# Altium PCB Axis Driver PCB.PcbDoc
Units mil, origin at the board's own origin, x right, y up, seen from the top; angles counter-clockwise.
Board outline 5830 x 2255 mil, 2 copper layers (Top Layer, Bottom Layer); 104 components, 89 nets, 420 pads, 120 vias.
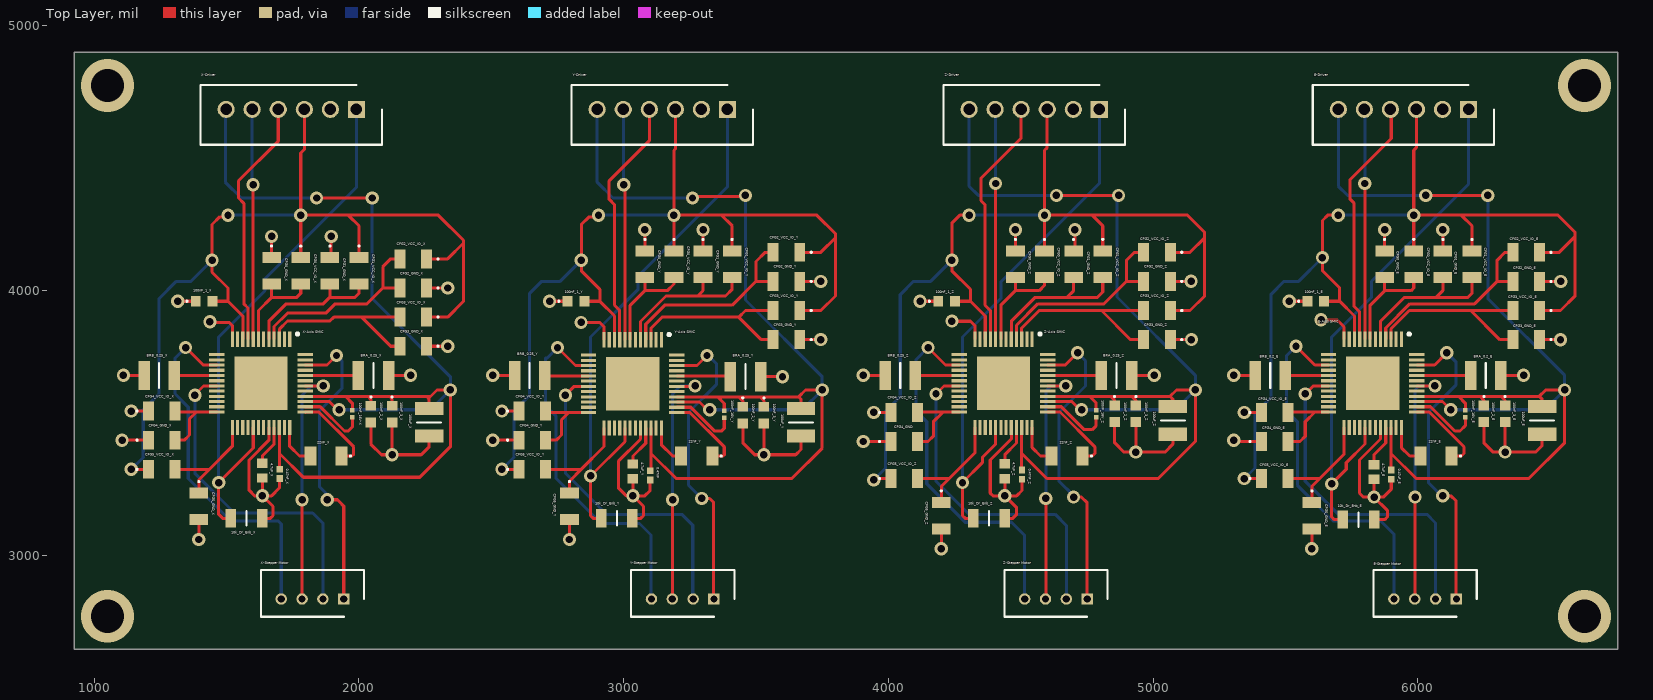
[diagram p0: Top Layer view]
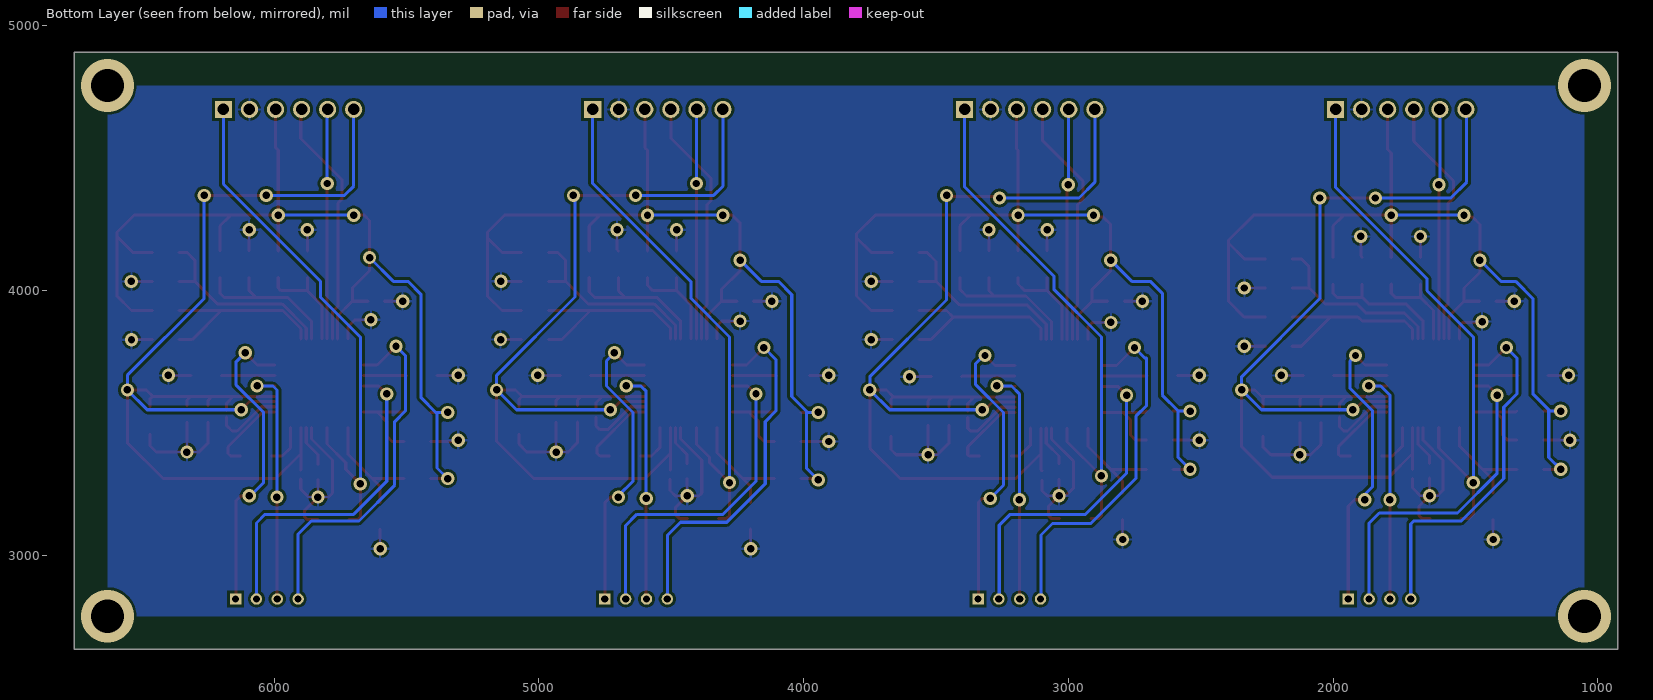
[diagram p1: Bottom Layer view, seen from below]
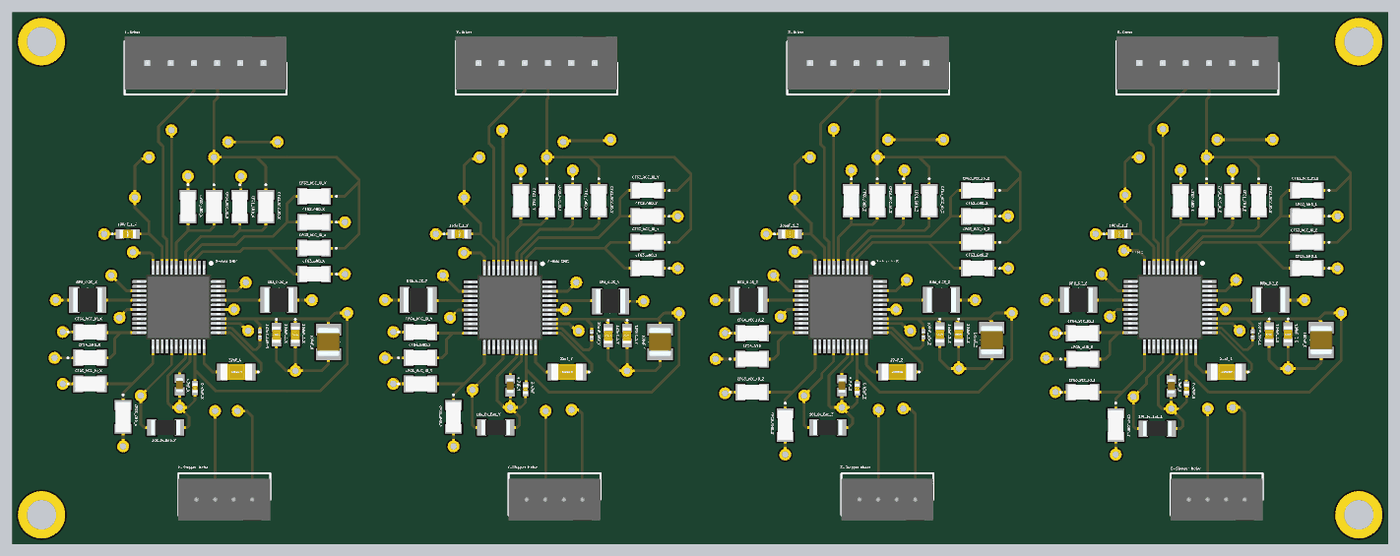
[diagram p2: 3D render of the assembled board from above, using the file's embedded part models]

## Layer stack, top to bottom
Top Solder: solder mask 0.4, Solder Resist, Dk 3.5
Top Layer: signal copper 1.4
Dielectric 1: dielectric 12.6, FR-4, Dk 4.8
Bottom Layer: signal copper 1.4
Bottom Solder: solder mask 0.4, Solder Resist, Dk 3.5

## Board outline
925,4900 6755,4900 6755,2645 925,2645

## Design rules (kind name [scope] priority, off if disabled: settings)
Clearance Clearance_1 [InNamedPolygon('GND_L02_P000')] p1: gap=10 ignorepadtopadclearanceinfootprint=FALSE
Clearance [All] p2: gap=5 ignorepadtopadclearanceinfootprint=FALSE
HoleSize [All] p1: absolutevalues=TRUE maxlimit=200 minlimit=1 maxpercent=80.000 minpercent=20.000
MinimumSolderMaskSliver [All] p1: minsoldermaskwidth=0.5
PolygonConnect [All] p1: connectstyle=Relief reliefconductorwidth=10 reliefentries=4 polygonreliefangle="90 Angle" airgapwidth=10
RoutingVias [All] p1: holewidth=28 width=50 viastyle="Through Hole" minholewidth=28 minwidth=50 maxholewidth=200 maxwidth=200
SilkToSilkClearance [All] p1: silktosilkclearance=5
SilkToSolderMaskClearance [IsPad] p1: minsilkscreentomaskgap=4 clearancetoexposedcopper=TRUE
SolderMaskExpansion [All] p1: expansion=7 istentingtop=FALSE
Width [All] p1: maxlimit=100 minlimit=10 preferedwidth=11.5
26 further rules are at their usual default settings.

## Classes and differential pairs
component class "U_Z-Axis Stepper Motor Driver": 0.47nF_Z 4.7uF_Z 10k_Dr_Enb_Z 22nF_Z 100nF_1_Z 100nF_2_Z 100nF_3_Z 100nF_16V_Z 100uF_Z BRA_0.25_Z BRB_0.25_Z CFG0_GND_Z CFG0_VCC_IO_Z CFG1_GND_Z CFG1_VCC_IO_Z CFG2_GND_Z CFG2_VCC_IO_Z CFG3_GND_Z CFG3_VCC_IO_Z CFG4_GND CFG4_VCC_IO_Z CFG5_GND_Z CFG5_VCC_IO_Z "Z-Axis SMIC"
component class "U_X_Axis Stepper Motor Driver": 0.47nF_X 4.7uF_X 10k_Dr_Enb_X 22nF_X 100nF_1_X 100nF_2_X 100nF_3_X 100nF_16V-X 100uF_X BRA_0.25_X BRB_0.25_X CFG0_GND_X CFG0_VCC_IO_X CFG1_GND_X CFG1_VCC_IO_X CFG2_GND_X CFG2_VCC_IO_X CFG3_GND_X CFG3_VCC_IO_X CFG4_GND_X CFG4_VCC_IO_X CFG5_GND_X CFG5_VCC_IO_X "X-Axis SMIC"
component class "U_Extruder Stepper Motor Driver": 0.47uF_E 4.7uF_E 10k_Dr_Enb_E 22nF_E 100nF_1_E 100nF_2_E 100nF_3_E 100nF_16V_E 100uF_E BRA_0.2_E BRB_0.2_E CFG0_GND_E CFG0_VCC_IO_E CFG1_GND_E CFG1_VCC_IO_E CFG2_GND_E CFG2_VCC_IO_E CFG3_GND_E CFG3_VCC_IO_E CFG4_GND_E CFG4_VCC_IO_E CFG5_GND_E CFG5_VCC_IO_E "E-Axis SMIC"
component class "Stepper Motor Driver Board": E-Driver E-Driver? "E-Stepper Motor" X-Driver "X-Stepper Motor" "X-Stepper Motor?" Y-Driver "Y-Stepper Motor" Z-Driver "Z-Stepper Motor"
component class "U_Y_Stepper Motor Driver": 0.47nF 4.7uF_Y 10k_Dr_Enb_Y 22nF_Y 100nF_1_Y 100nF_2_Y 100nF_3_Y 100uF_Y BRA_0.25_Y BRA_GND BRB_0.25_Y BRB_GND CFG0_GND_Y CFG0_VCC_IO_Y CFG1_GND_Y CFG1_VCC_IO_Y CFG2_GND_Y CFG2_VCC_IO_Y CFG3_GND_Y CFG3_VCC_IO_Y CFG4_GND_Y CFG4_VCC_IO_Y CFG5_GND_Y CFG5_VCC_IO_Y "Y-Axis SMIC"

## Components (designator, comment, footprint, x,y, rotation, side; value= is the part's Value field where it differs from the comment)
0.47nF "C0402C474K9RACTU" CAPC1005X55N 3100,3302.32 r270 top
0.47nF_X "C0402C474K9RACTU" CAPC1005X55N 1700,3307.68 r270 top
0.47nF_Z "C0402C474K9RACTU" CAPC1005X55N 4505,3305 r270 top
0.47uF_E "C0402C474K9RACTU" CAPC1005X55N 5900,3305 r270 top
4.7uF_E "GCJ188C70J475KE02D" CAPC1608X100N 5835,3315 r90 top
4.7uF_X "GCJ188C70J475KE02D" CAPC1608X100N 1635,3320 r90 top
4.7uF_Y "GCJ188C70J475KE02D" CAPC1608X100N 3035,3317.05 r90 top
4.7uF_Z "GCJ188C70J475KE02D" CAPC1608X100N 4440,3317.95 r90 top
10k_Dr_Enb_E "RC1206FR-7W10KL" RESC3116X65N 5775.94,3135 r180 top
10k_Dr_Enb_X "RC1206FR-7W10KL" RESC3116X65N 1575,3140 r180 top
10k_Dr_Enb_Y "RC1206FR-7W10KL" RESC3116X65N 2974.06,3140 r180 top
10k_Dr_Enb_Z "RC1206FR-7W10KL" RESC3116X65N 4380,3140 r180 top
22nF_E "C1206C223KMRECTU" C1206 6069.06,3375 r180 top
22nF_X "C1206C223KMRECTU" C1206 1875,3375 r180 top
22nF_Y "C1206C223KMRECTU" C1206 3275.94,3375 r180 top
22nF_Z "C1206C223KMRECTU" C1206 4675,3375 r180 top
100nF_1_E "C0603C104K9RACTU" C0603 5615,3960 r0 top
100nF_1_X "C0603C104K9RACTU" C0603 1415,3960 r0 top
100nF_1_Y "C0603C104K9RACTU" C0603 2820,3960 r0 top
100nF_1_Z "C0603C104K9RACTU" C0603 4220,3960 r0 top
100nF_2_E "C0603C104K9RACTU" C0603 6250,3535 r270 top
100nF_2_X "C0603C104K9RACTU" C0603 2045,3533.5 r270 top
100nF_2_Y "C0603C104K9RACTU" C0603 3450,3530 r270 top
100nF_2_Z "C0603C104K9RACTU" C0603 4855,3535 r270 top
100nF_3_E "C0603C104K9RACTU" C0603 6330,3535 r270 top
100nF_3_X "C0603C104K9RACTU" C0603 2125,3533.5 r270 top
100nF_3_Y "C0603C104K9RACTU" C0603 3530,3530 r270 top
100nF_3_Z "C0603C104K9RACTU" C0603 4935,3535 r270 top
100nF_16V-X "GRM033R61C104KE14D" CAPC0603X33N 1975,3535 r270 top
100nF_16V_E "GRM033R61C104KE14D" CAPC0603X33N 6180,3535 r270 top
100nF_16V_Y "GRM033R61C104KE14D" CAPC0603X33N 3380,3532.99 r270 top
100nF_16V_Z "GRM033R61C104KE14D" CAPC0603X33N 4785,3535 r270 top
100uF_E "GRM32EC80G107KE20L" CAPC3225X270N 6470,3510 r270 top
100uF_X "GRM32EC80G107KE20L" CAPC3225X270N 2265,3502.64 r270 top
100uF_Y "GRM32EC80G107KE20L" CAPC3225X270N 3670,3502.64 r270 top
100uF_Z "GRM32EC80G107KE20L" CAPC3225X270N 5075,3510 r270 top
BRA_0.2_E "RL1210FR-070R25L" RESC3126X65N 6257.09,3680 r0 top
BRA_0.25_X "RL1210FR-070R25L" RESC3126X65N 2055,3680 r0 top
BRA_0.25_Y "RL1210FR-070R25L" RESC3126X65N 3460,3675 r0 top
BRA_0.25_Z "RL1210FR-070R25L" RESC3126X65N 4862.09,3680 r0 top
BRB_0.2_E "RL1210FR-070R25L" RESC3126X65N 5442.91,3680 r180 top
BRB_0.25_X "RL1210FR-070R25L" RESC3126X65N 1245,3680 r180 top
BRB_0.25_Y "RL1210FR-070R25L" RESC3126X65N 2645,3680 r180 top
BRB_0.25_Z "RL1210FR-070R25L" RESC3126X65N 4045,3680 r180 top
CFG0_GND_E "RCC120647K0FKEA" RCC1206_e3 5875,4100.2 r270 top
CFG0_GND_X "RCC120647K0FKEA" RCC1206_e3 1670,4075 r270 top
CFG0_GND_Y "RCC120647K0FKEA" RCC1206_e3 3080,4100 r270 top
CFG0_GND_Z "RCC120647K0FKEA" RCC1206_e3 4480,4100 r270 top
CFG0_VCC_IO_E "RCC120647K0FKEA" RCC1206_e3 5985,4100.2 r270 top
CFG0_VCC_IO_X "RCC120647K0FKEA" RCC1206_e3 1780,4075 r270 top
CFG0_VCC_IO_Y "RCC120647K0FKEA" RCC1206_e3 3190,4100 r270 top
CFG0_VCC_IO_Z "RCC120647K0FKEA" RCC1206_e3 4590,4100 r270 top
CFG1_GND_E "RCC120647K0FKEA" RCC1206_e3 6095,4100.2 r270 top
CFG1_GND_X "RCC120647K0FKEA" RCC1206_e3 1890,4075 r270 top
CFG1_GND_Y "RCC120647K0FKEA" RCC1206_e3 3300,4100 r270 top
CFG1_GND_Z "RCC120647K0FKEA" RCC1206_e3 4700,4100 r270 top
CFG1_VCC_IO_E "RCC120647K0FKEA" RCC1206_e3 6205,4100.2 r270 top
CFG1_VCC_IO_X "RCC120647K0FKEA" RCC1206_e3 2000,4075 r270 top
CFG1_VCC_IO_Y "RCC120647K0FKEA" RCC1206_e3 3410,4100 r270 top
CFG1_VCC_IO_Z "RCC120647K0FKEA" RCC1206_e3 4810,4100 r270 top
CFG2_GND_E "RCC120647K0FKEA" RCC1206_e3 6410,4035 r180 top
CFG2_GND_X "RCC120647K0FKEA" RCC1206_e3 2205,4010 r180 top
CFG2_GND_Y "RCC120647K0FKEA" RCC1206_e3 3615,4035 r180 top
CFG2_GND_Z "RCC120647K0FKEA" RCC1206_e3 5015,4035 r180 top
CFG2_VCC_IO_E "RCC120647K0FKEA" RCC1206_e3 6410,4145 r180 top
CFG2_VCC_IO_X "RCC120647K0FKEA" RCC1206_e3 2205,4120 r180 top
CFG2_VCC_IO_Y "RCC120647K0FKEA" RCC1206_e3 3615,4145 r180 top
CFG2_VCC_IO_Z "RCC120647K0FKEA" RCC1206_e3 5015,4145 r180 top
CFG3_GND_E "RCC120647K0FKEA" RCC1206_e3 6410,3815 r180 top
CFG3_GND_X "RCC120647K0FKEA" RCC1206_e3 2205,3790 r180 top
CFG3_GND_Y "RCC120647K0FKEA" RCC1206_e3 3615,3815 r180 top
CFG3_GND_Z "RCC120647K0FKEA" RCC1206_e3 5015,3815 r180 top
CFG3_VCC_IO_E "RCC120647K0FKEA" RCC1206_e3 6410,3925 r180 top
CFG3_VCC_IO_X "RCC120647K0FKEA" RCC1206_e3 2205,3900 r180 top
CFG3_VCC_IO_Y "RCC120647K0FKEA" RCC1206_e3 3615,3925 r180 top
CFG3_VCC_IO_Z "RCC120647K0FKEA" RCC1206_e3 5015,3925 r180 top
CFG4_GND "RCC120647K0FKEA" RCC1206_e3 4060,3430 r0 top
CFG4_GND_E "RCC120647K0FKEA" RCC1206_e3 5460.2,3430 r0 top
CFG4_GND_X "RCC120647K0FKEA" RCC1206_e3 1255,3435 r0 top
CFG4_GND_Y "RCC120647K0FKEA" RCC1206_e3 2655,3435 r0 top
CFG4_VCC_IO_E "RCC120647K0FKEA" RCC1206_e3 5459.8,3540 r0 top
CFG4_VCC_IO_X "RCC120647K0FKEA" RCC1206_e3 1255,3545 r0 top
CFG4_VCC_IO_Y "RCC120647K0FKEA" RCC1206_e3 2655,3545 r0 top
CFG4_VCC_IO_Z "RCC120647K0FKEA" RCC1206_e3 4059.8,3540 r0 top
CFG5_GND_E "RCC120647K0FKEA" RCC1206_e3 5600,3150 r270 top
CFG5_GND_X "RCC120647K0FKEA" RCC1206_e3 1395,3184.8 r270 top
CFG5_GND_Y "RCC120647K0FKEA" RCC1206_e3 2795,3184.8 r270 top
CFG5_GND_Z "RCC120647K0FKEA" RCC1206_e3 4200,3150 r270 top
CFG5_VCC_IO_E "RCC120647K0FKEA" RCC1206_e3 5460,3290 r0 top
CFG5_VCC_IO_X "RCC120647K0FKEA" RCC1206_e3 1255,3325 r0 top
CFG5_VCC_IO_Y "RCC120647K0FKEA" RCC1206_e3 2655,3325 r0 top
CFG5_VCC_IO_Z "RCC120647K0FKEA" RCC1206_e3 4060,3290 r0 top
"E-Axis SMIC" "TMC2130-TA-T" QFP50P900X900X120-49N 5830,3650 r270 top
E-Driver "B6B-XH-A_LF__SN_" SHDR6W64P0X250_1X6_1740X575X700P 6192.13,4685 r180 top
"E-Stepper Motor" "B4B-PH-K-S_LF__SN_" SHDR4W50P0X200_1X4_990X450X600P 6146.22,2835 r0 top
"X-Axis SMIC" "TMC2130-TA-T" QFP50P900X900X120-49N 1630,3650 r270 top
X-Driver "B6B-XH-A_LF__SN_" SHDR6W64P0X250_1X6_1740X575X700P 1990.28,4685 r180 top
"X-Stepper Motor" "B4B-PH-K-S_LF__SN_" SHDR4W50P0X200_1X4_990X450X600P 1942.48,2835 r0 top
"Y-Axis SMIC" "TMC2130-TA-T" QFP50P900X900X120-49N 3034.21,3648.15 r270 top
Y-Driver "B6B-XH-A_LF__SN_" SHDR6W64P0X250_1X6_1740X575X700P 3392.13,4685 r180 top
"Y-Stepper Motor" "B4B-PH-K-S_LF__SN_" SHDR4W50P0X200_1X4_990X450X600P 3341.22,2835 r0 top
"Z-Axis SMIC" "TMC2130-TA-T" QFP50P900X900X120-49N 4435,3650 r270 top
Z-Driver "B6B-XH-A_LF__SN_" SHDR6W64P0X250_1X6_1740X575X700P 4797.13,4685 r180 top
"Z-Stepper Motor" "B4B-PH-K-S_LF__SN_" SHDR4W50P0X200_1X4_990X450X600P 4751.22,2835 r0 top

## Footprints (in the part's own frame and the unit in brackets; to place one, negate y for a bottom-side part, rotate by r counter-clockwise, add the part's x,y. Pads: shape width x height; smd on the part's side, far side on the other; paste and mask are expansions set on the pad)
C0603 [mm]
  rect 0.95x1 smd: 1(-0.8,0) 2(0.8,0)
  silkscreen extent -1.7,-0.05 -1.6,0.05, body extent -0.87,-0.48 0.88,0.47, height 0.87
C1206 [mm]
  rect 1.15x1.8 smd: 1(-1.5,0) 2(1.5,0)
  silkscreen extent -2.4,-0.05 -2.3,0.05, body extent -1.7,-0.9 1.7,0.9, height 1.75
CAPC0603X33N [mm]
  rect 0.46x0.42 smd: 1(-0.33,0) 2(0.33,0)
  body extent -0.3,-0.15 0.3,0.15, height 0.33
CAPC1005X55N [mm]
  rect 0.65x0.62 smd: 1(-0.44,0) 2(0.44,0)
  body extent -0.52,-0.28 0.53,0.27, height 0.55
CAPC1608X100N [mm]
  rect 0.9x1.02 smd: 1(-0.71,0) 2(0.71,0)
  body extent -0.8,-0.4 0.8,0.4, height 1
CAPC3225X270N [mm]
  rect 1.26x2.72 smd: 1(-1.33,0) 2(1.33,0)
  silkscreen extent 0,-1.15 0,1.15, body extent -1.6,-1.25 1.6,1.25, height 2.7
QFP50P900X900X120-49N [mm]
  rect 1.475x0.3 smd: 1(-4.238,2.75) 2(-4.238,2.25) 3(-4.238,1.75) 4(-4.238,1.25) 5(-4.238,0.75) 6(-4.238,0.25) 7(-4.238,-0.25) 8(-4.238,-0.75) 9(-4.238,-1.25) 10(-4.238,-1.75) 11(-4.238,-2.25) 12(-4.238,-2.75) 25(4.238,-2.75) 26(4.238,-2.25) 27(4.238,-1.75) 28(4.238,-1.25) 29(4.238,-0.75) 30(4.238,-0.25) 31(4.238,0.25) 32(4.238,0.75) 33(4.238,1.25) 34(4.238,1.75) 35(4.238,2.25) 36(4.238,2.75)
  rect 0.3x1.475 smd: 13(-2.75,-4.238) 14(-2.25,-4.238) 15(-1.75,-4.238) 16(-1.25,-4.238) 17(-0.75,-4.238) 18(-0.25,-4.238) 19(0.25,-4.238) 20(0.75,-4.238) 21(1.25,-4.238) 22(1.75,-4.238) 23(2.25,-4.238) 24(2.75,-4.238) 37(2.75,4.238) 38(2.25,4.238) 39(1.75,4.238) 40(1.25,4.238) 41(0.75,4.238) 42(0.25,4.238) 43(-0.25,4.238) 44(-0.75,4.238) 45(-1.25,4.238) 46(-1.75,4.238) 47(-2.25,4.238) 48(-2.75,4.238)
  rect 5.1x5.1 smd: 49(0,0)
  silkscreen extent -4.85,3.38 -4.6,3.63, body extent -4.5,-4.5 4.5,4.5, height 1.2
RCC1206_e3 [mm]
  rect 1.05x1.8 smd: 1(-1.275,0) 2(1.275,0)
  silkscreen extent -2.42,-0.05 -2.33,0.05, body extent -1.6,-0.8 1.6,0.8, height 0.55
RESC3116X65N [mm]
  rect 1x1.75 smd: 1(-1.5,0) 2(1.5,0)
  silkscreen extent 0,-0.7 0,0.7, body extent -1.55,-0.8 1.55,0.8, height 0.65
RESC3126X65N [mm]
  rect 1.1x2.8 smd: 1(-1.45,0) 2(1.45,0)
  silkscreen extent 0,-1.2 0,1.2, body extent -1.55,-1.3 1.55,1.3, height 0.65
SHDR4W50P0X200_1X4_990X450X600P [mm]
  rect 1.1x1.1 hole 0.7: 1(0,0)
  round 1.1 hole 0.7: 2(-2,0) 3(-4,0) 4(-6,0)
  silkscreen extent -7.95,-1.7 1.95,2.8, body extent -7.95,-2.25 1.95,2.25, height 6
SHDR6W64P0X250_1X6_1740X575X700P [mm]
  rect 1.65x1.65 hole 1.1: 1(0,0)
  round 1.65 hole 1.1: 2(2.5,0) 3(5,0) 4(7.5,0) 5(10,0) 6(12.5,0)
  silkscreen extent -2.45,-2.35 14.95,3.4, body extent -2.45,-2.88 14.95,2.88, height 7

## Part data
0.47nF 0.47nF_X 0.47nF_Z 0.47uF_E: "Capacitor", Manufacturer_Name=KEMET, Mouser Part Number=80-C0402C474K9RACTU, Datasheet Link=https://content.kemet.com/datasheets/KEM_C1002_X7R_SMD.pdf, Height=0.55mm, Manufacturer_Part_Number=C0402C474K9RACTU, Mouser Price/Stock=https://www.mouser.co.uk/ProductDetail/KEMET/C0402C474K9RACTU?qs=iLbezkQI%252BshEQvJDr%2FWmpQ%3D%3D
4.7uF_E 4.7uF_X 4.7uF_Y 4.7uF_Z: "Capacitor", Manufacturer_Name="Murata Electronics", Mouser Part Number=81-GCJ188C70J475KE2D, Arrow Part Number=GCJ188C70J475KE02D, Arrow Price/Stock=https://www.arrow.com/en/products/gcj188c70j475ke02d/murata-manufacturing?region=nac, Datasheet Link=https://psearch.en.murata.com/capacitor/product/GCJ188C70J475KE02%23.html, Height=1mm, Manufacturer_Part_Number=GCJ188C70J475KE02D, Mouser Price/Stock=https://www.mouser.co.uk/ProductDetail/Murata-Electronics/GCJ188C70J475KE02D?qs=QzBtWTOodeVfJR8CElrI4A%3D%3D
10k_Dr_Enb_E 10k_Dr_Enb_X 10k_Dr_Enb_Y 10k_Dr_Enb_Z: "Resistor", Manufacturer_Name=KEMET, Arrow Part Number=RC1206FR-7W10KL, Arrow Price/Stock=https://www.arrow.com/en/products/rc1206fr-7w10kl/yageo, Datasheet Link=https://datasheet.datasheetarchive.com/originals/distributors/Datasheets_SAMA/902f9e387b938f871d31120f5fc1d65e.pdf, Height=0.65mm, Manufacturer_Part_Number=RC1206FR-7W10KL
22nF_E 22nF_X 22nF_Y 22nF_Z: "Capacitor", Manufacturer_Name=KEMET, Mouser Part Number=80-C1206C223KMRECTU, Datasheet Link=https://content.kemet.com/datasheets/KEM_C1090_X7R_ESD.pdf, Manufacturer_Part_Number=C1206C223KMRECTU, Mouser Price/Stock=https://www.mouser.co.uk/ProductDetail/KEMET/C1206C223KMRECTU?qs=55YtniHzbhA1XbH3T1d9uw%3D%3D
100nF_1_E 100nF_1_X 100nF_1_Y 100nF_1_Z 100nF_2_E 100nF_2_X 100nF_2_Y 100nF_2_Z 100nF_3_E 100nF_3_X 100nF_3_Y 100nF_3_Z: "Capacitor", Manufacturer_Name=KEMET, Mouser Part Number=80-C0603C104K9R, Arrow Part Number=C0603C104K9RACTU, Arrow Price/Stock=https://www.arrow.com/en/products/c0603c104k9ractu/kemet-corporation?region=nac, Datasheet Link=https://content.kemet.com/datasheets/KEM_C1002_X7R_SMD.pdf, Height=0.87mm, Manufacturer_Part_Number=C0603C104K9RACTU, Mouser Price/Stock=https://www.mouser.co.uk/ProductDetail/KEMET/C0603C104K9RACTU?qs=7q2aiX3GdliuPZzPpldOsA%3D%3D
100nF_16V-X 100nF_16V_E 100nF_16V_Y 100nF_16V_Z: "Capacitor", Manufacturer_Name="Murata Electronics", Mouser Part Number=81-GRM033R61C104KE4D, Arrow Part Number=GRM033R61C104KE14D, Arrow Price/Stock=https://www.arrow.com/en/products/grm033r61c104ke14d/murata-manufacturing?region=nac, Datasheet Link=https://psearch.en.murata.com/capacitor/product/GRM033R61C104KE14%23.html, Height=0.33mm, Manufacturer_Part_Number=GRM033R61C104KE14D, Mouser Price/Stock=https://www.mouser.co.uk/ProductDetail/Murata-Electronics/GRM033R61C104KE14D?qs=jHkklCh7amhDvY8zUHp0eA%3D%3D
100uF_E 100uF_X 100uF_Y 100uF_Z: "Capacitor", Manufacturer_Name="Murata Electronics", Mouser Part Number=81-GRM32EC80G107KE0L, Arrow Part Number=GRM32EC80G107KE20L, Arrow Price/Stock=https://www.arrow.com/en/products/grm32ec80g107ke20l/murata-manufacturing, Datasheet Link=https://datasheet.datasheetarchive.com/originals/distributors/DKDS-10/192475.pdf, Height=2.7mm, Manufacturer_Part_Number=GRM32EC80G107KE20L, Mouser Price/Stock=https://www.mouser.co.uk/ProductDetail/Murata-Electronics/GRM32EC80G107KE20L?qs=eeBpzGFlv%252B8VEtl0LRYzNQ%3D%3D
BRA_0.2_E BRA_0.25_X BRA_0.25_Y BRA_0.25_Z BRB_0.2_E BRB_0.25_X BRB_0.25_Y BRB_0.25_Z: "Resistor", Manufacturer_Name=KEMET, Mouser Part Number=603-RL1210FR-070R25L, Datasheet Link=https://www.mouser.de/datasheet/2/447/PYu-RL_Group_521_RoHS_L_2-1131815.pdf, Height=0.65mm, Manufacturer_Part_Number=RL1210FR-070R25L, Mouser Price/Stock=https://www.mouser.co.uk/ProductDetail/Yageo/RL1210FR-070R25L?qs=k2KEx2DUIRR2Lho3B1zagg%3D%3D
CFG0_GND_E CFG0_GND_X CFG0_GND_Y CFG0_GND_Z CFG0_VCC_IO_E CFG0_VCC_IO_X CFG0_VCC_IO_Y CFG0_VCC_IO_Z CFG1_GND_E CFG1_GND_X CFG1_GND_Y CFG1_GND_Z CFG1_VCC_IO_E CFG1_VCC_IO_X CFG1_VCC_IO_Y CFG1_VCC_IO_Z CFG2_GND_E CFG2_GND_X CFG2_GND_Y CFG2_GND_Z CFG2_VCC_IO_E CFG2_VCC_IO_X CFG2_VCC_IO_Y CFG2_VCC_IO_Z CFG3_GND_E CFG3_GND_X CFG3_GND_Y CFG3_GND_Z CFG3_VCC_IO_E CFG3_VCC_IO_X CFG3_VCC_IO_Y CFG3_VCC_IO_Z CFG4_GND CFG4_GND_E CFG4_GND_X CFG4_GND_Y CFG4_VCC_IO_E CFG4_VCC_IO_X CFG4_VCC_IO_Y CFG4_VCC_IO_Z CFG5_GND_E CFG5_GND_X CFG5_GND_Y CFG5_GND_Z CFG5_VCC_IO_E CFG5_VCC_IO_X CFG5_VCC_IO_Y CFG5_VCC_IO_Z: "Resistor", Manufacturer_Name=Vishay, Mouser Part Number=71-RCC120647K0FKEA, Datasheet Link=https://www.vishay.com/docs/20066/rcce3.pdf, Height=0.6mm, Manufacturer_Part_Number=RCC120647K0FKEA, Mouser Price/Stock=https://www.mouser.co.uk/ProductDetail/Vishay-Dale/RCC120647K0FKEA?qs=IS%252B4QmGtzzrgga70d3fY5w%3D%3D
"E-Axis SMIC" "X-Axis SMIC" "Y-Axis SMIC" "Z-Axis SMIC": "Integrated Circuit", Manufacturer_Name=TRINAMIC, Mouser Part Number=700-TMC2130-TA-T, Datasheet Link=https://www.trinamic.com/fileadmin/assets/Products/ICs_Documents/TMC2130_datasheet.pdf, Height=1.2mm, Manufacturer_Part_Number=TMC2130-TA-T, Mouser Price/Stock=https://www.mouser.co.uk/ProductDetail/Trinamic/TMC2130-TA-T?qs=TiOZkKH1s2SorQX5NhxZsQ%3D%3D
E-Driver X-Driver Y-Driver Z-Driver: "Connector", Arrow Part Number=B6B-XH-A(LF)(SN), Manufacturer_Name="JST (JAPAN SOLDERLESS TERMINALS)", Arrow Price/Stock=https://www.arrow.com/en/products/b6b-xh-a-lf-sn/jst-manufacturing?region=europe, Datasheet Link=https://datasheet.lcsc.com/szlcsc/JST-Sales-America-B6B-XH-A-LF-SN_C144397.pdf, Height=7mm, Manufacturer_Part_Number=B6B-XH-A(LF)(SN)
"E-Stepper Motor" "X-Stepper Motor" "Y-Stepper Motor" "Z-Stepper Motor": "Connector", Arrow Part Number=B4B-PH-K-S(LF)(SN), Manufacturer_Name="JST (JAPAN SOLDERLESS TERMINALS)", Arrow Price/Stock=https://www.arrow.com/en/products/b4b-ph-k-s-lf-sn/jst-manufacturing, Datasheet Link=https://datasheet.lcsc.com/szlcsc/JST-Sales-America-B4B-PH-K-S-LF-SN_C131334.pdf, Height=6mm, Manufacturer_Part_Number=B4B-PH-K-S(LF)(SN)

## Via types
v1: diameter 50, hole 28, Top Layer to Bottom Layer, 116 vias
v2: diameter 200, hole 125, Top Layer to Bottom Layer, 4 vias

## Nets (pads, with @x,y where several pads share a name; then routed paths per layer and width w, separated by ;. In a path a pad name is that pad's centre, name@x,y a point inside that pad or via, vN(x,y) a via of type N, cw(c..) or ccw(c..) an arc to the next point about the centre after c; other vN are vias at no path point)
GND: 0.47nF.2 0.47nF_X.2 0.47nF_Z.2 0.47uF_E.2 4.7uF_E.1 4.7uF_X.1 4.7uF_Y.1 4.7uF_Z.1 10k_Dr_Enb_E.1 10k_Dr_Enb_X.1 10k_Dr_Enb_Y.1 10k_Dr_Enb_Z.1 100nF_1_E.1 100nF_1_X.1 100nF_1_Y.1 100nF_1_Z.1 100nF_2_E.2 100nF_2_X.2 100nF_2_Y.2 100nF_2_Z.2 100nF_3_E.2 100nF_3_X.2 100nF_3_Y.2 100nF_3_Z.2 100uF_E.2 100uF_X.2 100uF_Y.2 100uF_Z.2 "E-Axis SMIC.12" "E-Axis SMIC.32" "X-Axis SMIC.12" "X-Axis SMIC.32" "Y-Axis SMIC.12" "Y-Axis SMIC.32" "Z-Axis SMIC.12" "Z-Axis SMIC.32" BRA_0.2_E.2 BRA_0.25_X.2 BRA_0.25_Y.2 BRA_0.25_Z.2 BRB_0.2_E.2 BRB_0.25_X.2 BRB_0.25_Y.2 BRB_0.25_Z.2 CFG0_GND_E.1 CFG0_GND_X.1 CFG0_GND_Y.1 CFG0_GND_Z.1 CFG1_GND_E.1 CFG1_GND_X.1 CFG1_GND_Y.1 CFG1_GND_Z.1 CFG2_GND_E.1 CFG2_GND_X.1 CFG2_GND_Y.1 CFG2_GND_Z.1 CFG3_GND_E.1 CFG3_GND_X.1 CFG3_GND_Y.1 CFG3_GND_Z.1 CFG4_GND.1 CFG4_GND_E.1 CFG4_GND_X.1 CFG4_GND_Y.1 CFG5_GND_E.2 CFG5_GND_X.2 CFG5_GND_Y.2 CFG5_GND_Z.2 E-Driver.2 X-Driver.2 Y-Driver.2 Z-Driver.2 | length 8038.5
  Top Layer w11.5: v1(1105,3435) CFG4_GND_X.1 ; v1(1110,3680) BRB_0.25_X.2 ; v1(1315,3960) 100nF_1_X.1 ; v1(1395,3060) CFG5_GND_X.2 ; v1(1436.67,3882.94) 1439.62,3880 1510,3880 1521.73,3868.27 1521.73,3816.85 ; 10k_Dr_Enb_X.1 1665,3140 1675,3150 1675,3185 v1(1635,3225) ; 4.7uF_X.1 v1(1635,3225) ; 1659.53,3483.15 1659.53,3434.53 1585,3360 1585,3245.42 1605.42,3225 v1(1635,3225) ; CFG0_GND_X.1 v1(1670,4205) ; 0.47nF_X.2 1700,3255 1670,3225 v1(1635,3225) ; CFG1_GND_X.1 1895,4130.2 v1(1895,4205) ; 100nF_2_X.2 2045,3420 2085,3380 v1(2125,3380) ; BRA_0.25_X.2 v1(2195,3680) ; 100nF_3_X.2 v1(2125,3380) ; CFG3_GND_X.1 v1(2335,3790) ; CFG2_GND_X.1 v1(2335,4010) ; 100uF_X.2 2265,3410 2235,3380 v1(2125,3380) ; v1(2505,3435) CFG4_GND_Y.1 ; v1(2505,3680) BRB_0.25_Y.2 ; v1(2720,3960) 100nF_1_Y.1 ; v1(2795,3060) CFG5_GND_Y.2 ; v1(2839.25,3880) 2910,3880 2925.94,3864.06 2925.94,3815 ; 10k_Dr_Enb_Y.1 3065,3140 3075,3150 3075,3185 v1(3035,3225) ; 4.7uF_Y.1 v1(3035,3225) ; 3063.74,3481.3 3063.74,3438.74 2980,3355 2980,3255 3010,3225 v1(3035,3225) ; CFG0_GND_Y.1 v1(3080,4230) ; 0.47nF.2 3100,3245 3080,3225 v1(3035,3225) ; CFG1_GND_Y.1 v1(3300,4230) ; 100nF_2_Y.2@3450,3492.01 3450,3425 3495,3380 v1(3530,3380) ; BRA_0.25_Y.2 v1(3600,3675) ; 100nF_3_Y.2@3530,3492.01 v1(3530,3380) ; CFG3_GND_Y.1 v1(3745,3815) ; CFG2_GND_Y.1 v1(3745,4035) ; 100uF_Y.2 3670,3400 3650,3380 v1(3530,3380) ; v1(3905,3430) CFG4_GND.1 ; v1(3905,3680) BRB_0.25_Z.2@3977.91,3680 ; v1(4120,3960) 100nF_1_Z.1 ; v1(4200,3025) CFG5_GND_Z.2 ; v1(4240,3885) 4240.54,3884.46 4310.54,3884.46 4326.73,3868.27 4326.73,3816.85 ; 10k_Dr_Enb_Z.1 4470,3140 4485,3155 4485,3180 v1(4440,3225) ; 4.7uF_Z.1 v1(4440,3225) ; 4464.53,3483.15 4464.53,3439.53 4385,3360 4385,3235 4395,3225 v1(4440,3225) ; CFG0_GND_Z.1 v1(4480,4230) ; 0.47nF_Z.2 4505,3245 4485,3225 v1(4440,3225) ; CFG1_GND_Z.1 4705,4155.2 v1(4705,4230) ; 100nF_2_Z.2 4855,3425 4890,3390 v1(4935,3390) ; BRA_0.25_Z.2 v1(5005,3680) ; 100nF_3_Z.2 v1(4935,3390) ; CFG3_GND_Z.1 v1(5145,3815) ; CFG2_GND_Z.1 5143.25,4035 v1(5143.74,4035.49) ; 100uF_Z.2 5075,3420 5045,3390 v1(4935,3390) ; v1(5305,3435) 5310,3430 CFG4_GND_E.1 ; v1(5305,3680) BRB_0.2_E.2 ; v1(5515,3960) 100nF_1_E.1 ; v1(5600,3025) CFG5_GND_E.2 ; v1(5635,3890) 5695,3890 5721.73,3863.27 5721.73,3816.85 ; 10k_Dr_Enb_E.1 5875,3135 5885,3145 5885,3170 v1(5835,3220) ; 4.7uF_E.1 v1(5835,3220) ; 5859.53,3483.15 5859.53,3439.53 5780,3360 5780,3235 5795,3220 v1(5835,3220) ; CFG0_GND_E.1 v1(5875,4230) ; 0.47uF_E.2 5900,3250 5870,3220 v1(5835,3220) ; CFG1_GND_E.1 v1(6095,4230) ; 100nF_2_E.2 6250,3425 6285,3390 v1(6330,3390) ; BRA_0.2_E.2 v1(6400,3680) ; 100nF_3_E.2 v1(6330,3390) ; CFG3_GND_E.1 6538.85,3815 v1(6539.4,3814.46) ; CFG2_GND_E.1 v1(6540,4035) ; 100uF_E.2 6470,3415 6445,3390 v1(6330,3390)
Net0.47nF_1: 0.47nF.1 100nF_2_Y.1 100nF_3_Y.1 100nF_16V_Y.1 100uF_Y.1 "Y-Axis SMIC.34" "Y-Axis SMIC.39" "Y-Axis SMIC.40" Y-Driver.6 | length 4186
  Top Layer w11.5: 0.47nF.1 3103.11,3322.76 3103.11,3385 ; 3103.11,3481.3 3103.11,3385 ; 3201.06,3579.25 3286.37,3579.25 3315.62,3550 v1(3325,3550) ; 3201.06,3598.94 3355,3598.94 ; v1(3260,4350) 3265,4355 3455,4355 v1(3460,4360) ; 100nF_16V_Y.1 3380,3573.94 3355,3598.94 ; 100nF_2_Y.1 3450,3583.94 3435,3598.94 ; 100nF_3_Y.1 3530,3583.94 3515,3598.94 ; 100uF_Y.1 3670,3590 3661.06,3598.94 ; 3103.11,3385 3198.11,3290 3635,3290 3750,3405 v1(3750,3625) 3687.13,3625 3661.06,3598.94 ; 3355,3598.94 3435,3598.94 ; 3435,3598.94 3515,3598.94 ; 3515,3598.94 3661.06,3598.94
  Bottom Layer w11.5: Y-Driver.6 2900,4410 2960,4350 v1(3260,4350) ; v1(3325,3550) 3675,3550 v1(3750,3625) 3750,3675 3460,3965 v1(3460,4360)
Net0.47nF_2: 
Net0.47nF_X_1: 0.47nF_X.1 100nF_2_X.1 100nF_3_X.1 100nF_16V-X.1 100uF_X.1 "X-Axis SMIC.34" "X-Axis SMIC.39" "X-Axis SMIC.40" X-Driver.6 | length 4147.6
  Top Layer w11.5: 1698.9,3483.15 1700,3482.05 1700,3385 ; 0.47nF_X.1 1700,3385 ; 1796.85,3581.1 1888.22,3581.1 1919.32,3550 v1(1925,3550) ; 1796.85,3600.79 1797.64,3600 1950,3600 ; v1(1840,4350) v1(2050,4350) ; 100nF_16V-X.1 1975,3575 1950,3600 ; 100nF_2_X.1 2045,3590 2035,3600 ; 100nF_3_X.1 2125,3590 2115,3600 ; 100uF_X.1 2265,3590 2255,3600 ; 1700,3385 1790,3295 2230,3295 2345,3410 v1(2345,3625) 2295,3625 2270,3600 2255,3600 ; 1950,3600 2035,3600 ; 2035,3600 2115,3600 ; 2115,3600 2255,3600
  Bottom Layer w11.5: X-Driver.6 1495,4681.85 1495,4410 1555,4350 v1(1840,4350) ; v1(1925,3550) 2270,3550 v1(2345,3625) 2345,3675 2050,3970 v1(2050,4350)
Net0.47nF_X_2: 
Net0.47nF_Z_1: 0.47nF_Z.1 100nF_2_Z.1 100nF_3_Z.1 100nF_16V_Z.1 100uF_Z.1 "Z-Axis SMIC.34" "Z-Axis SMIC.39" "Z-Axis SMIC.40" Z-Driver.6 | length 4196.7
  Top Layer w11.5: 4503.9,3483.15 4503.9,3385 ; 0.47nF_Z.1 4503.9,3323.43 4503.9,3385 ; 4601.85,3581.1 4693.22,3581.1 4724.32,3550 v1(4730,3550) ; 4601.85,3600.79 4760,3600.79 ; v1(4635,4360) v1(4870,4360) ; 100nF_16V_Z.1 4785,3575.79 4760,3600.79 ; 100nF_2_Z.1 4855,3585.79 4840,3600.79 ; 100nF_3_Z.1 4935,3585.79 4920,3600.79 ; 100uF_Z.1 5075,3590 5064.21,3600.79 ; 4503.9,3385 4598.9,3290 5020,3290 5160,3430 v1(5160,3625) 5088.43,3625 5064.21,3600.79 ; 4760,3600.79 4840,3600.79 ; 4840,3600.79 4920,3600.79 ; 4920,3600.79 5064.21,3600.79
  Bottom Layer w11.5: Z-Driver.6 4305,4395 4340,4360 v1(4635,4360) ; v1(4730,3550) 5085,3550 v1(5160,3625) 5160,3680 4863.9,3976.1 4863.9,4353.9 v1(4870,4360)
Net0.47nF_Z_2: 
Net0.47uF_E_1: 0.47uF_E.1 100nF_2_E.1 100nF_3_E.1 100nF_16V_E.1 100uF_E.1 "E-Axis SMIC.34" "E-Axis SMIC.39" "E-Axis SMIC.40" E-Driver.6 | length 4194.9
  Top Layer w11.5: 5898.9,3483.15 5898.9,3385 ; 0.47uF_E.1 5898.9,3323.43 5898.9,3385 ; 5996.85,3581.1 6093.9,3581.1 v1(6125,3550) ; 5996.85,3600.79 6154.21,3600.79 ; v1(6030,4360) v1(6265,4360) ; 100nF_16V_E.1 6180,3575 6154.21,3600.79 ; 100nF_2_E.1 6250,3585.79 6235,3600.79 ; 100nF_3_E.1 6330,3585.79 6315,3600.79 ; 100uF_E.1 6470,3590 6459.21,3600.79 ; 5898.9,3385 5993.9,3290 6420,3290 6555,3425 v1(6555,3625) 6483.43,3625 6459.21,3600.79 ; 6154.21,3600.79 6235,3600.79 ; 6235,3600.79 6315,3600.79 ; 6315,3600.79 6459.21,3600.79
  Bottom Layer w11.5: E-Driver.6 5700,4395 5735,4360 v1(6030,4360) ; v1(6125,3550) 6480,3550 v1(6555,3625) 6555,3680 6265,3970 v1(6265,4360)
Net0.47uF_E_2: 
Net4.7uF_E_2: 4.7uF_E.2 "E-Axis SMIC.33" | length 158.5
  Top Layer w11.5: 4.7uF_E.2 5835,3380 5879.21,3424.21 5879.21,3483.15
Net4.7uF_X_2: 4.7uF_X.2 "X-Axis SMIC.33" | length 153.5
  Top Layer w11.5: 4.7uF_X.2 1635,3375 1679.21,3419.21 1679.21,3483.15
Net4.7uF_Y_2: 4.7uF_Y.2 "Y-Axis SMIC.33" | length 156.4
  Top Layer w11.5: 4.7uF_Y.2 3035,3375 3083.43,3423.43 3083.43,3481.3
Net4.7uF_Z_2: 4.7uF_Z.2 "Z-Axis SMIC.33" | length 155.6
  Top Layer w11.5: 4.7uF_Z.2 4440,3380 4484.21,3424.21 4484.21,3483.15
Net10k_Dr_Enb_E_2: 10k_Dr_Enb_E.2 "E-Axis SMIC.29" E-Driver.1 | length 2065.4
  Top Layer w11.5: 10k_Dr_Enb_E.2 5685,3135 5675,3145 v1(5675,3270) 5730,3325 5730,3350 5800.47,3420.47 5800.47,3483.15
  Bottom Layer w11.5: v1(5675,3270) 5675,3825 5825,3975 5825,4035 6192.13,4402.13 E-Driver.1
Net10k_Dr_Enb_X_2: 10k_Dr_Enb_X.2 "X-Axis SMIC.29" X-Driver.1 | length 2059.9
  Top Layer w11.5: 10k_Dr_Enb_X.2 1485,3140 1470,3155 v1(1470,3275) 1600.47,3405.47 1600.47,3483.15
  Bottom Layer w11.5: v1(1470,3275) 1470,3825 1645,4000 1645,4045 1990.28,4390.28 X-Driver.1
Net10k_Dr_Enb_Y_2: 10k_Dr_Enb_Y.2 "Y-Axis SMIC.29" Y-Driver.1 | length 2028.4
  Top Layer w11.5: 10k_Dr_Enb_Y.2 2885,3140 2875,3150 v1(2875,3300) 3004.68,3429.68 3004.68,3481.3
  Bottom Layer w11.5: v1(2875,3300) 2875,3825 3055,4005 3055,4055 3392.13,4392.13 Y-Driver.1
Net10k_Dr_Enb_Z_2: 10k_Dr_Enb_Z.2 "Z-Axis SMIC.29" Z-Driver.1 | length 2054.4
  Top Layer w11.5: 10k_Dr_Enb_Z.2 4290,3140 4280,3150 v1(4280,3275) 4355,3350 4355,3370 4405.47,3420.47 4405.47,3483.15
  Bottom Layer w11.5: v1(4280,3275) 4280,3825 4425,3970 4425,4032.87 4797.13,4405 Z-Driver.1
Net22nF_E_1: 22nF_E.1 "E-Axis SMIC.37" | length 308.7
  Top Layer w11.5: 5996.85,3541.73 6043.27,3541.73 6175,3410 6175,3385 6165,3375 22nF_E.1
Net22nF_E_2: 22nF_E.2 "E-Axis SMIC.36" | length 161.3
  Top Layer w11.5: 5938.27,3483.15 5938.27,3406.73 5970,3375 22nF_E.2
Net22nF_X_1: 22nF_X.1 "X-Axis SMIC.37" | length 317.2
  Top Layer w11.5: 1798.58,3540 1796.85,3541.73 1848.27,3541.73 1980,3410 1980,3381.74 1973.26,3375 22nF_X.1
Net22nF_X_2: 22nF_X.2 "X-Axis SMIC.36" | length 164.3
  Top Layer w11.5: 1738.27,3483.15 1738.27,3411.73 1775,3375 22nF_X.2
Net22nF_Y_1: 22nF_Y.1 "Y-Axis SMIC.37" | length 309.8
  Top Layer w11.5: 3201.06,3539.88 3250.12,3539.88 3380,3410 3380,3380 3375,3375 22nF_Y.1
Net22nF_Y_2: 22nF_Y.2 "Y-Axis SMIC.36" | length 155.8
  Top Layer w11.5: 3142.48,3481.3 3142.48,3417.52 3185,3375 22nF_Y.2
Net22nF_Z_1: 22nF_Z.1 "Z-Axis SMIC.37" | length 307.8
  Top Layer w11.5: 4601.85,3541.73 4648.27,3541.73 4780,3410 4780,3385 4770,3375 22nF_Z.1
Net22nF_Z_2: 22nF_Z.2 "Z-Axis SMIC.36" | length 162.2
  Top Layer w11.5: 4543.27,3483.15 4543.27,3406.73 4575,3375 22nF_Z.2
Net100nF_1_E_2: 100nF_1_E.2 "E-Axis SMIC.10" CFG0_VCC_IO_E.1 CFG1_VCC_IO_E.1 CFG2_VCC_IO_E.1 CFG3_VCC_IO_E.1 CFG4_VCC_IO_E.1 CFG5_VCC_IO_E.1 E-Driver.3 | length 3957.9
  Top Layer w11.5: v1(5345,3290) CFG5_VCC_IO_E.1 ; v1(5345,3540) CFG4_VCC_IO_E.1 ; 100nF_1_E.2 5705,3960 ; v1(5700,4285) 5660,4285 5640,4265 v1(5640,4125) 5640,4075 5705,4010 5705,3960 ; 5761.1,3816.85 5761.1,3903.9 5705,3960 ; CFG0_VCC_IO_E.1 v1(5985,4285) ; E-Driver.3 5995,4684.72 5995,4540 5985,4530 v1(5985,4285) ; CFG1_VCC_IO_E.1 6205,4245 6165,4285 ; CFG3_VCC_IO_E.1 6539.68,3925 6595,3980.32 6595,4205 ; CFG2_VCC_IO_E.1 6535,4145 6595,4205 ; v1(5985,4285) 6165,4285 ; 6165,4285 6530,4285 6595,4220 6595,4205
  Bottom Layer w11.5: v1(5345,3290) 5385,3330 5385,3535 5390,3540 ; v1(5345,3540) 5390,3540 ; v1(5640,4125) 5550,4035 5495,4035 5445,3985 5445,3595 5390,3540 ; v1(5700,4285) v1(5985,4285)
Net100nF_1_X_2: 100nF_1_X.2 "X-Axis SMIC.10" CFG0_VCC_IO_X.1 CFG1_VCC_IO_X.1 CFG2_VCC_IO_X.1 CFG3_VCC_IO_X.1 CFG4_VCC_IO_X.1 CFG5_VCC_IO_X.1 X-Driver.3 | length 3971.2
  Top Layer w11.5: v1(1140,3325) CFG5_VCC_IO_X.1 ; v1(1140,3545) CFG4_VCC_IO_X.1 ; 100nF_1_X.2 1505,3960 ; v1(1505,4285) 1499.12,4279.12 1474.12,4279.12 1445,4250 v1(1445,4115) 1445,4070 1505,4010 1505,3960 ; 1561.1,3816.85 1561.1,3903.9 1505,3960 ; CFG0_VCC_IO_X.1 v1(1780,4285) ; X-Driver.3 1795,4683.43 1795,4535 1780,4520 v1(1780,4285) ; CFG1_VCC_IO_X.1 2000,4245 1960,4285 ; CFG3_VCC_IO_X.1 2335,3900 2395,3960 2395,4180 ; CFG2_VCC_IO_X.1 2335,4120 2395,4180 ; v1(1780,4285) 1960,4285 ; 1960,4285 2300,4285 2395,4190 2395,4180
  Bottom Layer w11.5: v1(1140,3325) 1185,3370 1185,3550 ; v1(1140,3545) 1180,3545 1185,3550 ; v1(1445,4115) 1365,4035 1310,4035 1245,3970 1245,3610 1185,3550 ; v1(1505,4285) v1(1780,4285)
Net100nF_1_Y_2: 100nF_1_Y.2 "Y-Axis SMIC.10" CFG0_VCC_IO_Y.1 CFG1_VCC_IO_Y.1 CFG2_VCC_IO_Y.1 CFG3_VCC_IO_Y.1 CFG4_VCC_IO_Y.1 CFG5_VCC_IO_Y.1 Y-Driver.3 | length 3917.3
  Top Layer w11.5: v1(2540,3325) CFG5_VCC_IO_Y.1 ; v1(2540,3545) CFG4_VCC_IO_Y.1 ; 100nF_1_Y.2 2910,3960 ; v1(2905,4285) 2897.63,4277.63 2867.63,4277.63 2840,4250 v1(2840,4115) 2840,4075 2910,4005 2910,3960 ; 2965.32,3815 2965.32,3904.68 2910,3960 ; CFG0_VCC_IO_Y.1 v1(3190,4285) ; Y-Driver.3 3195.28,4535.28 3190,4530 v1(3190,4285) ; CFG1_VCC_IO_Y.1 3410,4245 3370,4285 ; CFG3_VCC_IO_Y.1 3745,3925 3800,3980 3800,4200 ; CFG2_VCC_IO_Y.1 3745,4145 3800,4200 ; v1(3190,4285) 3370,4285 ; 3370,4285 3730,4285 3800,4215 3800,4200
  Bottom Layer w11.5: v1(2540,3325) 2585,3370 2585,3545 ; v1(2540,3545) 2585,3545 ; v1(2840,4115) 2760,4035 2690,4035 2645,3990 2645,3605 2585,3545 ; v1(2905,4285) v1(3190,4285)
Net100nF_1_Z_2: 100nF_1_Z.2 "Z-Axis SMIC.10" CFG0_VCC_IO_Z.1 CFG1_VCC_IO_Z.1 CFG2_VCC_IO_Z.1 CFG3_VCC_IO_Z.1 CFG4_VCC_IO_Z.1 CFG5_VCC_IO_Z.1 Z-Driver.3 | length 3947.7
  Top Layer w11.5: v1(3945,3285) 3950,3290 CFG5_VCC_IO_Z.1 ; v1(3945,3540) CFG4_VCC_IO_Z.1 ; 100nF_1_Z.2 4310,3960 ; v1(4305,4285) 4270,4285 4240,4255 v1(4240,4115) 4240,4075 4310,4005 4310,3960 ; 4366.1,3816.85 4366.1,3903.9 4310,3960 ; CFG0_VCC_IO_Z.1 v1(4590,4285) ; Z-Driver.3 4600,4684.72 4600,4540 4590,4530 v1(4590,4285) ; CFG1_VCC_IO_Z.1 4810,4245 4770,4285 ; CFG3_VCC_IO_Z.1 5140,3925 5195,3980 5195,4200 ; CFG2_VCC_IO_Z.1 5140,4145 5195,4200 ; v1(4590,4285) 4770,4285 ; 4770,4285 5130,4285 5195,4220 5195,4200
  Bottom Layer w11.5: v1(3945,3285) 3990,3330 3990,3545 ; v1(3945,3540) 3985,3540 3990,3545 ; v1(4240,4115) 4160,4035 4095,4035 4045,3985 4045,3600 3990,3545 ; v1(4305,4285) v1(4590,4285)
Net100nF_16V-X_2: 100nF_16V-X.2 "X-Axis SMIC.38" | length 259.2
  Top Layer w11.5: 1796.85,3561.42 1853.58,3561.42 1945,3470 1960,3470 1975,3485 100nF_16V-X.2
Net100nF_16V_E_2: 100nF_16V_E.2 "E-Axis SMIC.38" | length 261.3
  Top Layer w11.5: 5996.85,3561.42 6048.58,3561.42 6140,3470 6160,3470 6180,3490 100nF_16V_E.2
Net100nF_16V_Y_2: 100nF_16V_Y.2 "Y-Axis SMIC.38" | length 260.9
  Top Layer w11.5: 3201.06,3559.57 3253.77,3559.57 3344.17,3469.17 3369.17,3469.17 3380,3480 100nF_16V_Y.2
Net100nF_16V_Z_2: 100nF_16V_Z.2 "Z-Axis SMIC.38" | length 257.2
  Top Layer w11.5: 4601.85,3561.42 4653.58,3561.42 4740,3475 4770,3475 4785,3490 100nF_16V_Z.2
NetBRA_0.2_E_1: "E-Axis SMIC.44" BRA_0.2_E.1 | length 203.3
  Top Layer w11.5: 5996.85,3679.53 6199.53,3679.53 BRA_0.2_E.1
NetBRA_0.25_X_1: "X-Axis SMIC.44" BRA_0.25_X.1 | length 201.3
  Top Layer w11.5: 1796.85,3679.53 1997.44,3679.53 BRA_0.25_X.1
NetBRA_0.25_Y_1: "Y-Axis SMIC.44" BRA_0.25_Y.1 | length 203
  Top Layer w11.5: 3201.06,3677.68 3400.24,3677.68 BRA_0.25_Y.1
NetBRA_0.25_Z_1: "Z-Axis SMIC.44" BRA_0.25_Z.1 | length 203.3
  Top Layer w11.5: 4601.85,3679.53 4804.53,3679.53 BRA_0.25_Z.1
NetBRB_0.2_E_1: "E-Axis SMIC.17" BRB_0.2_E.1 | length 163.3
  Top Layer w11.5: BRB_0.2_E.1 5500.47,3679.53 5663.15,3679.53
NetBRB_0.25_X_1: "X-Axis SMIC.17" BRB_0.25_X.1 | length 161.9
  Top Layer w11.5: BRB_0.25_X.1@1302.56,3679.53 BRB_0.25_X.1 1462.68,3680 1463.15,3679.53
NetBRB_0.25_Y_1: "Y-Axis SMIC.17" BRB_0.25_Y.1 | length 166.2
  Top Layer w11.5: BRB_0.25_Y.1 2704.41,3677.68 2867.36,3677.68
NetBRB_0.25_Z_1: "Z-Axis SMIC.17" BRB_0.25_Z.1 | length 166.3
  Top Layer w11.5: BRB_0.25_Z.1 4102.56,3679.53 4268.15,3679.53
NetCFG0_GND_E_2: "E-Axis SMIC.7" CFG0_GND_E.2 CFG0_VCC_IO_E.2 | length 410
  Top Layer w11.5: 5820.16,3816.85 5820.16,3945.16 5875,4000 ; CFG0_GND_E.2 5875,4000 ; CFG0_VCC_IO_E.2 5985,4010 5975,4000 5875,4000
NetCFG0_GND_X_2: "X-Axis SMIC.7" CFG0_GND_X.2 CFG0_VCC_IO_X.2 | length 379.6
  Top Layer w11.5: 1620.16,3816.85 1620.16,3925.16 1670,3975 ; CFG0_GND_X.2 1670,3975 ; CFG0_VCC_IO_X.2 1780,3990 1765,3975 1670,3975
NetCFG0_GND_Y_2: "Y-Axis SMIC.7" CFG0_GND_Y.2 CFG0_VCC_IO_Y.2 | length 403
  Top Layer w11.5: 3024.37,3815 3024.37,3944.37 3080,4000 ; CFG0_GND_Y.2 3080,4000 ; CFG0_VCC_IO_Y.2 3190,4025 3165,4000 3080,4000
NetCFG0_GND_Z_2: "Z-Axis SMIC.7" CFG0_GND_Z.2 CFG0_VCC_IO_Z.2 | length 403.8
  Top Layer w11.5: 4425.16,3816.85 4425.16,3945.16 4480,4000 ; CFG0_GND_Z.2 4480,4000 ; CFG0_VCC_IO_Z.2 4590,4020 4570,4000 4480,4000
NetCFG1_GND_E_2: "E-Axis SMIC.5" CFG1_GND_E.2 CFG1_VCC_IO_E.2 | length 602.2
  Top Layer w11.5: 5859.53,3816.85 5859.53,3884.53 5950,3975 6070,3975 ; CFG1_GND_E.2 6095,4000 6070,3975 ; CFG1_VCC_IO_E.2 6205,3990 6190,3975 6070,3975
NetCFG1_GND_X_2: "X-Axis SMIC.5" CFG1_GND_X.2 CFG1_VCC_IO_X.2 | length 536.4
  Top Layer w11.5: 1659.53,3816.85 1659.53,3884.53 1725,3950 1865,3950 1890,3975 ; CFG1_GND_X.2 1890,3975 ; CFG1_VCC_IO_X.2 2000,3990 1985,3975 1890,3975
NetCFG1_GND_Y_2: "Y-Axis SMIC.5" CFG1_GND_Y.2 CFG1_VCC_IO_Y.2 | length 588.1
  Top Layer w11.5: 3063.74,3815 3063.74,3883.74 3160,3980 3280,3980 ; CFG1_GND_Y.2 3300,4000 3280,3980 ; CFG1_VCC_IO_Y.2 3410,4005 3385,3980 3280,3980
NetCFG1_GND_Z_2: "Z-Axis SMIC.5" CFG1_GND_Z.2 CFG1_VCC_IO_Z.2 | length 598.9
  Top Layer w11.5: 4464.53,3816.85 4464.53,3884.53 4555,3975 4675,3975 ; CFG1_GND_Z.2 4700,4000 4675,3975 ; CFG1_VCC_IO_Z.2 4810,3995 4790,3975 4675,3975
NetCFG2_GND_E_2: "E-Axis SMIC.4" CFG2_GND_E.2 CFG2_VCC_IO_E.2 | length 748
  Top Layer w11.5: 5879.21,3816.85 5879.21,3859.21 5970,3950 6215,3950 6300,4035 ; CFG2_GND_E.2 6300,4035 ; CFG2_VCC_IO_E.2 6330,4145 6300,4115 6300,4035
NetCFG2_GND_X_2: "X-Axis SMIC.4" CFG2_GND_X.2 CFG2_VCC_IO_X.2 | length 740.6
  Top Layer w11.5: 1679.21,3816.85 1679.21,3864.21 1730,3915 1875,3915 1910,3950 2030,3950 2090,4010 ; CFG2_GND_X.2 2090,4010 ; CFG2_VCC_IO_X.2 2120,4120 2090,4090 2090,4010
NetCFG2_GND_Y_2: "Y-Axis SMIC.4" CFG2_GND_Y.2 CFG2_VCC_IO_Y.2 | length 761
  Top Layer w11.5: 3083.43,3815 3083.43,3873.43 3155,3945 3410,3945 3500,4035 ; CFG2_GND_Y.2 3500,4035 ; CFG2_VCC_IO_Y.2 3535,4145 3500,4110 3500,4035
NetCFG2_GND_Z_2: "Z-Axis SMIC.4" CFG2_GND_Z.2 CFG2_VCC_IO_Z.2 | length 758.9
  Top Layer w11.5: 4484.21,3816.85 4484.21,3869.21 4565,3950 4815,3950 4900,4035 ; CFG2_GND_Z.2 4900,4035 ; CFG2_VCC_IO_Z.2 4930,4145 4900,4115 4900,4035
NetCFG3_GND_E_2: "E-Axis SMIC.3" CFG3_GND_E.2 CFG3_VCC_IO_E.2 | length 733.7
  Top Layer w11.5: 5898.9,3816.85 5899.05,3817.01 5899.05,3855.72 5968.33,3925 6200,3925 ; CFG3_GND_E.2 6310,3815 6200,3925 ; CFG3_VCC_IO_E.2 6200,3925
NetCFG3_GND_X_2: "X-Axis SMIC.3" CFG3_GND_X.2 CFG3_VCC_IO_X.2 | length 702.4
  Top Layer w11.5: 1698.9,3816.85 1698.9,3853.9 1730,3885 1890,3885 1905,3900 2010,3900 ; CFG3_GND_X.2 2120,3790 2010,3900 ; CFG3_VCC_IO_X.2 2010,3900
NetCFG3_GND_Y_2: "Y-Axis SMIC.3" CFG3_GND_Y.2 CFG3_VCC_IO_Y.2 | length 697.5
  Top Layer w11.5: 3103.11,3815 3103.11,3858.11 3145,3900 3435,3900 ; CFG3_GND_Y.2 3520,3815 3435,3900 ; CFG3_VCC_IO_Y.2 3460,3925 3435,3900
NetCFG3_GND_Z_2: "Z-Axis SMIC.3" CFG3_GND_Z.2 CFG3_VCC_IO_Z.2 | length 735.7
  Top Layer w11.5: 4503.9,3816.85 4503.9,3858.9 4570,3925 4805,3925 ; CFG3_GND_Z.2 4915,3815 4805,3925 ; CFG3_VCC_IO_Z.2 4805,3925
NetCFG4_GND_2: "Z-Axis SMIC.24" CFG4_GND.2 CFG4_VCC_IO_Z.2 | length 333.2
  Top Layer w11.5: CFG4_VCC_IO_Z.2 4111.73,3541.73 4205,3541.73 ; CFG4_GND.2 4150,3430 4170,3450 4170,3505 4205,3540 4205,3541.73 ; 4268.15,3541.73 4205,3541.73
NetCFG4_GND_E_2: "E-Axis SMIC.24" CFG4_GND_E.2 CFG4_VCC_IO_E.2 | length 333.7
  Top Layer w11.5: CFG4_VCC_IO_E.2 5511.73,3541.73 5611.73,3541.73 ; CFG4_GND_E.2 5555,3430 5575,3450 5575,3505 5611.73,3541.73 ; 5663.15,3541.73 5611.73,3541.73
NetCFG4_GND_X_2: "X-Axis SMIC.24" CFG4_GND_X.2 CFG4_VCC_IO_X.2 | length 319.8
  Top Layer w11.5: CFG4_GND_X.2 1340,3435 1360,3455 1360,3515.93 1385.81,3541.73 ; CFG4_VCC_IO_X.2 1308.46,3541.73 1385.81,3541.73 ; 1463.15,3541.73 1385.81,3541.73
NetCFG4_GND_Y_2: "Y-Axis SMIC.24" CFG4_GND_Y.2 CFG4_VCC_IO_Y.2 | length 327.1
  Top Layer w11.5: CFG4_GND_Y.2 2745,3435 2765,3455 2765,3511.73 2788.84,3535.57 2788.84,3539.88 ; CFG4_VCC_IO_Y.2 2710.32,3539.88 2788.84,3539.88 ; 2867.36,3539.88 2788.84,3539.88
NetCFG5_GND_E_1: "E-Axis SMIC.25" CFG5_GND_E.1 CFG5_VCC_IO_E.2 | length 453.2
  Top Layer w11.5: CFG5_VCC_IO_E.2 5630,3290 ; CFG5_GND_E.1 5600,3260 5630,3290 ; 5721.73,3483.15 5721.73,3381.73 5630,3290
NetCFG5_GND_X_1: "X-Axis SMIC.25" CFG5_GND_X.1 CFG5_VCC_IO_X.2 | length 430.4
  Top Layer w11.5: CFG5_VCC_IO_X.2 1435,3325 ; CFG5_GND_X.1 1395,3285 1435,3325 ; 1521.73,3483.15 1521.73,3411.73 1435,3325
NetCFG5_GND_Y_1: "Y-Axis SMIC.25" CFG5_GND_Y.1 CFG5_VCC_IO_Y.2 | length 435.3
  Top Layer w11.5: CFG5_VCC_IO_Y.2 2840,3325 ; CFG5_GND_Y.1 2795,3280 2840,3325 ; 2925.94,3481.3 2925.94,3410.94 2840,3325
NetCFG5_GND_Z_1: "Z-Axis SMIC.25" CFG5_GND_Z.1 CFG5_VCC_IO_Z.2 | length 455.3
  Top Layer w11.5: CFG5_VCC_IO_Z.2 4230,3290 ; CFG5_GND_Z.1 4200,3260 4230,3290 ; 4326.73,3483.15 4326.73,3386.73 4230,3290
"NetE-Axis SMIC_8": "E-Axis SMIC.8" E-Driver.5 | length 869
  Top Layer w11.5: v1(5800,4405) 5800.47,4404.53 5800.47,3816.85
  Bottom Layer w11.5: E-Driver.5 5800,4683.43 v1(5800,4405)
"NetE-Axis SMIC_9": "E-Axis SMIC.9" E-Driver.4 | length 948.5
  Top Layer w11.5: 5780.79,3816.85 5780.79,3919.21 5760,3940 5760,4330 5745,4345 5745,4420 5900,4575 5900,4681.85 E-Driver.4
"NetE-Axis SMIC_15": "E-Axis SMIC.15" "E-Stepper Motor.4" | length 1395.3
  Top Layer w11.5: v1(5540,3790) 5611.1,3718.9 5663.15,3718.9
  Bottom Layer w11.5: v1(5540,3790) 5505,3755 5505,3545 5545,3505 5545,3265 5680,3130 5860,3130 5910,3080 5910,2835
"NetE-Axis SMIC_19": "E-Axis SMIC.19" "E-Stepper Motor.2" | length 1275.9
  Top Layer w11.5: v1(5575,3610) 5605.16,3640.16 5663.15,3640.16
  Bottom Layer w11.5: v1(5575,3610) 5575,3280 5700,3155 6035,3155 6067.48,3122.52 6067.48,2835
"NetE-Axis SMIC_42": "E-Axis SMIC.42" "E-Stepper Motor.3" | length 939.9
  Top Layer w11.5: 5988.74,2835 5989.37,2835.63 5989.37,3219.37 v1(5990,3220) ; 5996.85,3640.16 6064.84,3640.16 v1(6065,3640)
  Bottom Layer w11.5: v1(5990,3220) 5990,3625 6005,3640 v1(6065,3640)
"NetE-Axis SMIC_46": "E-Axis SMIC.46" "E-Stepper Motor.1" | length 1184.7
  Top Layer w11.5: 5996.85,3718.9 6063.9,3718.9 v1(6110,3765) ; v1(6095,3225) 6125,3225 6145,3205 6145,2836.22 6146.22,2835
  Bottom Layer w11.5: v1(6095,3225) 6090,3225 6040,3275 6040,3540 6145,3645 6145,3730 v1(6110,3765)
"NetX-Axis SMIC_8": "X-Axis SMIC.8" X-Driver.5 | length 869.8
  Top Layer w11.5: v1(1600,4400) 1600.32,4399.68 1600.32,3817.01 1600.47,3816.85
  Bottom Layer w11.5: X-Driver.5 1596.57,4403.43 v1(1600,4400)
"NetX-Axis SMIC_9": "X-Axis SMIC.9" X-Driver.4 | length 945.1
  Top Layer w11.5: 1580.79,3816.85 1580.79,3934.21 1565,3950 1565,4330 1545,4350 1545,4415 1695,4565 X-Driver.4
"NetX-Axis SMIC_15": "X-Axis SMIC.15" "X-Stepper Motor.4" | length 1383.7
  Top Layer w11.5: v1(1345,3785) 1411.1,3718.9 1463.15,3718.9
  Bottom Layer w11.5: v1(1345,3785) 1305,3745 1305,3610 1355,3560 1355,3290 1515,3130 1695,3130 1706.26,3118.74 1706.26,2835
"NetX-Axis SMIC_19": "X-Axis SMIC.19" "X-Stepper Motor.2" | length 1242.3
  Top Layer w11.5: v1(1380,3605) 1380,3607.43 1412.72,3640.16 1463.15,3640.16
  Bottom Layer w11.5: v1(1380,3605) 1380,3310 1530,3160 1825,3160 1863.74,3121.26 1863.74,2835
"NetX-Axis SMIC_42": "X-Axis SMIC.42" "X-Stepper Motor.3" | length 932.7
  Top Layer w11.5: 1785,2835 v1(1785,3210) ; 1796.85,3640.16 1796.93,3640.08 1864.92,3640.08 v1(1865,3640)
  Bottom Layer w11.5: v1(1785,3210) 1785,3605 1820,3640 v1(1865,3640)
"NetX-Axis SMIC_46": "X-Axis SMIC.46" "X-Stepper Motor.1" | length 1157.3
  Top Layer w11.5: 1796.85,3718.9 1878.9,3718.9 v1(1915,3755) ; v1(1880,3210) 1918.26,3210 1925,3203.26 1942.48,3185.78 1942.48,2835
  Bottom Layer w11.5: v1(1880,3210) 1880,3230 1850,3260 1850,3545 1935,3630 1935,3735 v1(1915,3755)
"NetY-Axis SMIC_8": "Y-Axis SMIC.8" Y-Driver.5 | length 872.6
  Top Layer w11.5: v1(3000,4400) 3004.53,4395.47 3004.53,3815.16 3004.68,3815
  Bottom Layer w11.5: Y-Driver.5 2999.21,4684.21 2999.21,4400.79 v1(3000,4400)
"NetY-Axis SMIC_9": "Y-Axis SMIC.9" Y-Driver.4 | length 949.5
  Top Layer w11.5: 2985,3815 2985,3925 2965,3945 2965,4325 2945,4345 2945,4415 3096.85,4566.85 Y-Driver.4
"NetY-Axis SMIC_15": "Y-Axis SMIC.15" "Y-Stepper Motor.4" | length 1367.7
  Top Layer w11.5: v1(2750,3785) 2817.95,3717.05 2867.36,3717.05
  Bottom Layer w11.5: v1(2750,3785) 2710,3745 2705,3745 2705,3565 2745,3525 2745,3290 2915,3120 3060,3120 3103.07,3076.93 3103.07,2836.93 3105,2835
"NetY-Axis SMIC_19": "Y-Axis SMIC.19" "Y-Stepper Motor.2" | length 1238
  Top Layer w11.5: v1(2780,3605) 2813.31,3638.31 2867.36,3638.31
  Bottom Layer w11.5: v1(2780,3605) 2780,3310 2935,3155 3220,3155 3260.95,3114.05 3260.95,2836.53 3262.48,2835
"NetY-Axis SMIC_42": "Y-Axis SMIC.42" "Y-Stepper Motor.3" | length 942.6
  Top Layer w11.5: 3183.74,2835 3185,2836.26 v1(3185,3210) ; 3201.06,3638.31 3201.22,3638.46 3268.46,3638.46 v1(3270,3640)
  Bottom Layer w11.5: v1(3185,3210) 3185,3610 3215,3640 v1(3270,3640)
"NetY-Axis SMIC_46": "Y-Axis SMIC.46" "Y-Stepper Motor.1" | length 1168
  Top Layer w11.5: 3201.06,3717.05 3277.05,3717.05 v1(3315,3755) ; v1(3295,3215) 3325,3215 3340,3200 3340,2836.22 3341.22,2835
  Bottom Layer w11.5: v1(3295,3215) 3245,3265 3245,3540 3350,3645 3350,3725 3320,3755 v1(3315,3755)
"NetZ-Axis SMIC_8": "Z-Axis SMIC.8" Z-Driver.5 | length 869
  Top Layer w11.5: 4405.47,3816.85 4405.32,3817.01 v1(4405.28,4404.72) ; v1(4405.28,4404.72) v1(4405.28,4404.72)
  Bottom Layer w11.5: Z-Driver.5 4404.21,4684.21 4404.21,4405.79 v1(4405.28,4404.72)
"NetZ-Axis SMIC_9": "Z-Axis SMIC.9" Z-Driver.4 | length 945.9
  Top Layer w11.5: 4385.79,3816.85 4385.79,3924.21 4365,3945 4365,4325 4350,4340 4350,4425 4501.85,4576.85 Z-Driver.4
"NetZ-Axis SMIC_15": "Z-Axis SMIC.15" "Z-Stepper Motor.4" | length 1386.5
  Top Layer w11.5: v1(4150,3785) 4216.1,3718.9 4268.15,3718.9
  Bottom Layer w11.5: v1(4150,3785) 4105,3740 4105,3545 4145,3505 4145,3270 4290,3125 4465,3125 4515,3075 4515,2835
"NetZ-Axis SMIC_19": "Z-Axis SMIC.19" "Z-Stepper Motor.2" | length 1270
  Top Layer w11.5: v1(4180,3610) 4210.16,3640.16 4268.15,3640.16
  Bottom Layer w11.5: v1(4180,3610) 4180,3280 4305,3155 4630,3155 4672.48,3112.52 4672.48,2835
"NetZ-Axis SMIC_42": "Z-Axis SMIC.42" "Z-Stepper Motor.3" | length 937
  Top Layer w11.5: 4593.74,2835 4595,2836.26 v1(4595,3215) ; 4601.85,3640.16 4601.93,3640.08 4669.92,3640.08 v1(4670,3640)
  Bottom Layer w11.5: v1(4595,3215) 4595,3620 4615,3640 v1(4670,3640)
"NetZ-Axis SMIC_46": "Z-Axis SMIC.46" "Z-Stepper Motor.1" | length 1177.7
  Top Layer w11.5: 4601.85,3718.9 4668.9,3718.9 v1(4715,3765) ; v1(4700,3220) 4730,3220 4751.22,3198.78 4751.22,2835
  Bottom Layer w11.5: v1(4700,3220) 4700,3225 4645,3280 4645,3540 4745,3640 4745,3735 v1(4715,3765)
pads on no net: "E-Axis SMIC.1" "E-Axis SMIC.2" "E-Axis SMIC.6" "E-Axis SMIC.11" "E-Axis SMIC.13" "E-Axis SMIC.14" "E-Axis SMIC.16" "E-Axis SMIC.18" "E-Axis SMIC.20" "E-Axis SMIC.21" "E-Axis SMIC.22" "E-Axis SMIC.23" "E-Axis SMIC.26" "E-Axis SMIC.27" "E-Axis SMIC.28" "E-Axis SMIC.30" "E-Axis SMIC.31" "E-Axis SMIC.35" "E-Axis SMIC.41" "E-Axis SMIC.43" "E-Axis SMIC.45" "E-Axis SMIC.47" "E-Axis SMIC.48" "E-Axis SMIC.49" "X-Axis SMIC.1" "X-Axis SMIC.2" "X-Axis SMIC.6" "X-Axis SMIC.11" "X-Axis SMIC.13" "X-Axis SMIC.14" "X-Axis SMIC.16" "X-Axis SMIC.18" "X-Axis SMIC.20" "X-Axis SMIC.21" "X-Axis SMIC.22" "X-Axis SMIC.23" "X-Axis SMIC.26" "X-Axis SMIC.27" "X-Axis SMIC.28" "X-Axis SMIC.30" "X-Axis SMIC.31" "X-Axis SMIC.35" "X-Axis SMIC.41" "X-Axis SMIC.43" "X-Axis SMIC.45" "X-Axis SMIC.47" "X-Axis SMIC.48" "X-Axis SMIC.49" "Y-Axis SMIC.1" "Y-Axis SMIC.2" "Y-Axis SMIC.6" "Y-Axis SMIC.11" "Y-Axis SMIC.13" "Y-Axis SMIC.14" "Y-Axis SMIC.16" "Y-Axis SMIC.18" "Y-Axis SMIC.20" "Y-Axis SMIC.21" "Y-Axis SMIC.22" "Y-Axis SMIC.23" "Y-Axis SMIC.26" "Y-Axis SMIC.27" "Y-Axis SMIC.28" "Y-Axis SMIC.30" "Y-Axis SMIC.31" "Y-Axis SMIC.35" "Y-Axis SMIC.41" "Y-Axis SMIC.43" "Y-Axis SMIC.45" "Y-Axis SMIC.47" "Y-Axis SMIC.48" "Y-Axis SMIC.49" "Z-Axis SMIC.1" "Z-Axis SMIC.2" "Z-Axis SMIC.6" "Z-Axis SMIC.11" "Z-Axis SMIC.13" "Z-Axis SMIC.14" "Z-Axis SMIC.16" "Z-Axis SMIC.18" "Z-Axis SMIC.20" "Z-Axis SMIC.21" "Z-Axis SMIC.22" "Z-Axis SMIC.23" "Z-Axis SMIC.26" "Z-Axis SMIC.27" "Z-Axis SMIC.28" "Z-Axis SMIC.30" "Z-Axis SMIC.31" "Z-Axis SMIC.35" "Z-Axis SMIC.41" "Z-Axis SMIC.43" "Z-Axis SMIC.45" "Z-Axis SMIC.47" "Z-Axis SMIC.48" "Z-Axis SMIC.49"
copper on no net:
  other v2: 1050,2770 6630,2770 1050,4775 6630,4775

## Polygon pours and split planes (outlines as drawn)
GND on Bottom Layer "GND_L02_P000" (solid, remove dead copper, pour order 0): 1050,4775 6630,4775 6630,2770 1050,2770